# EAGLE board OpenBook_v69 (EAGLE 9.7.0)
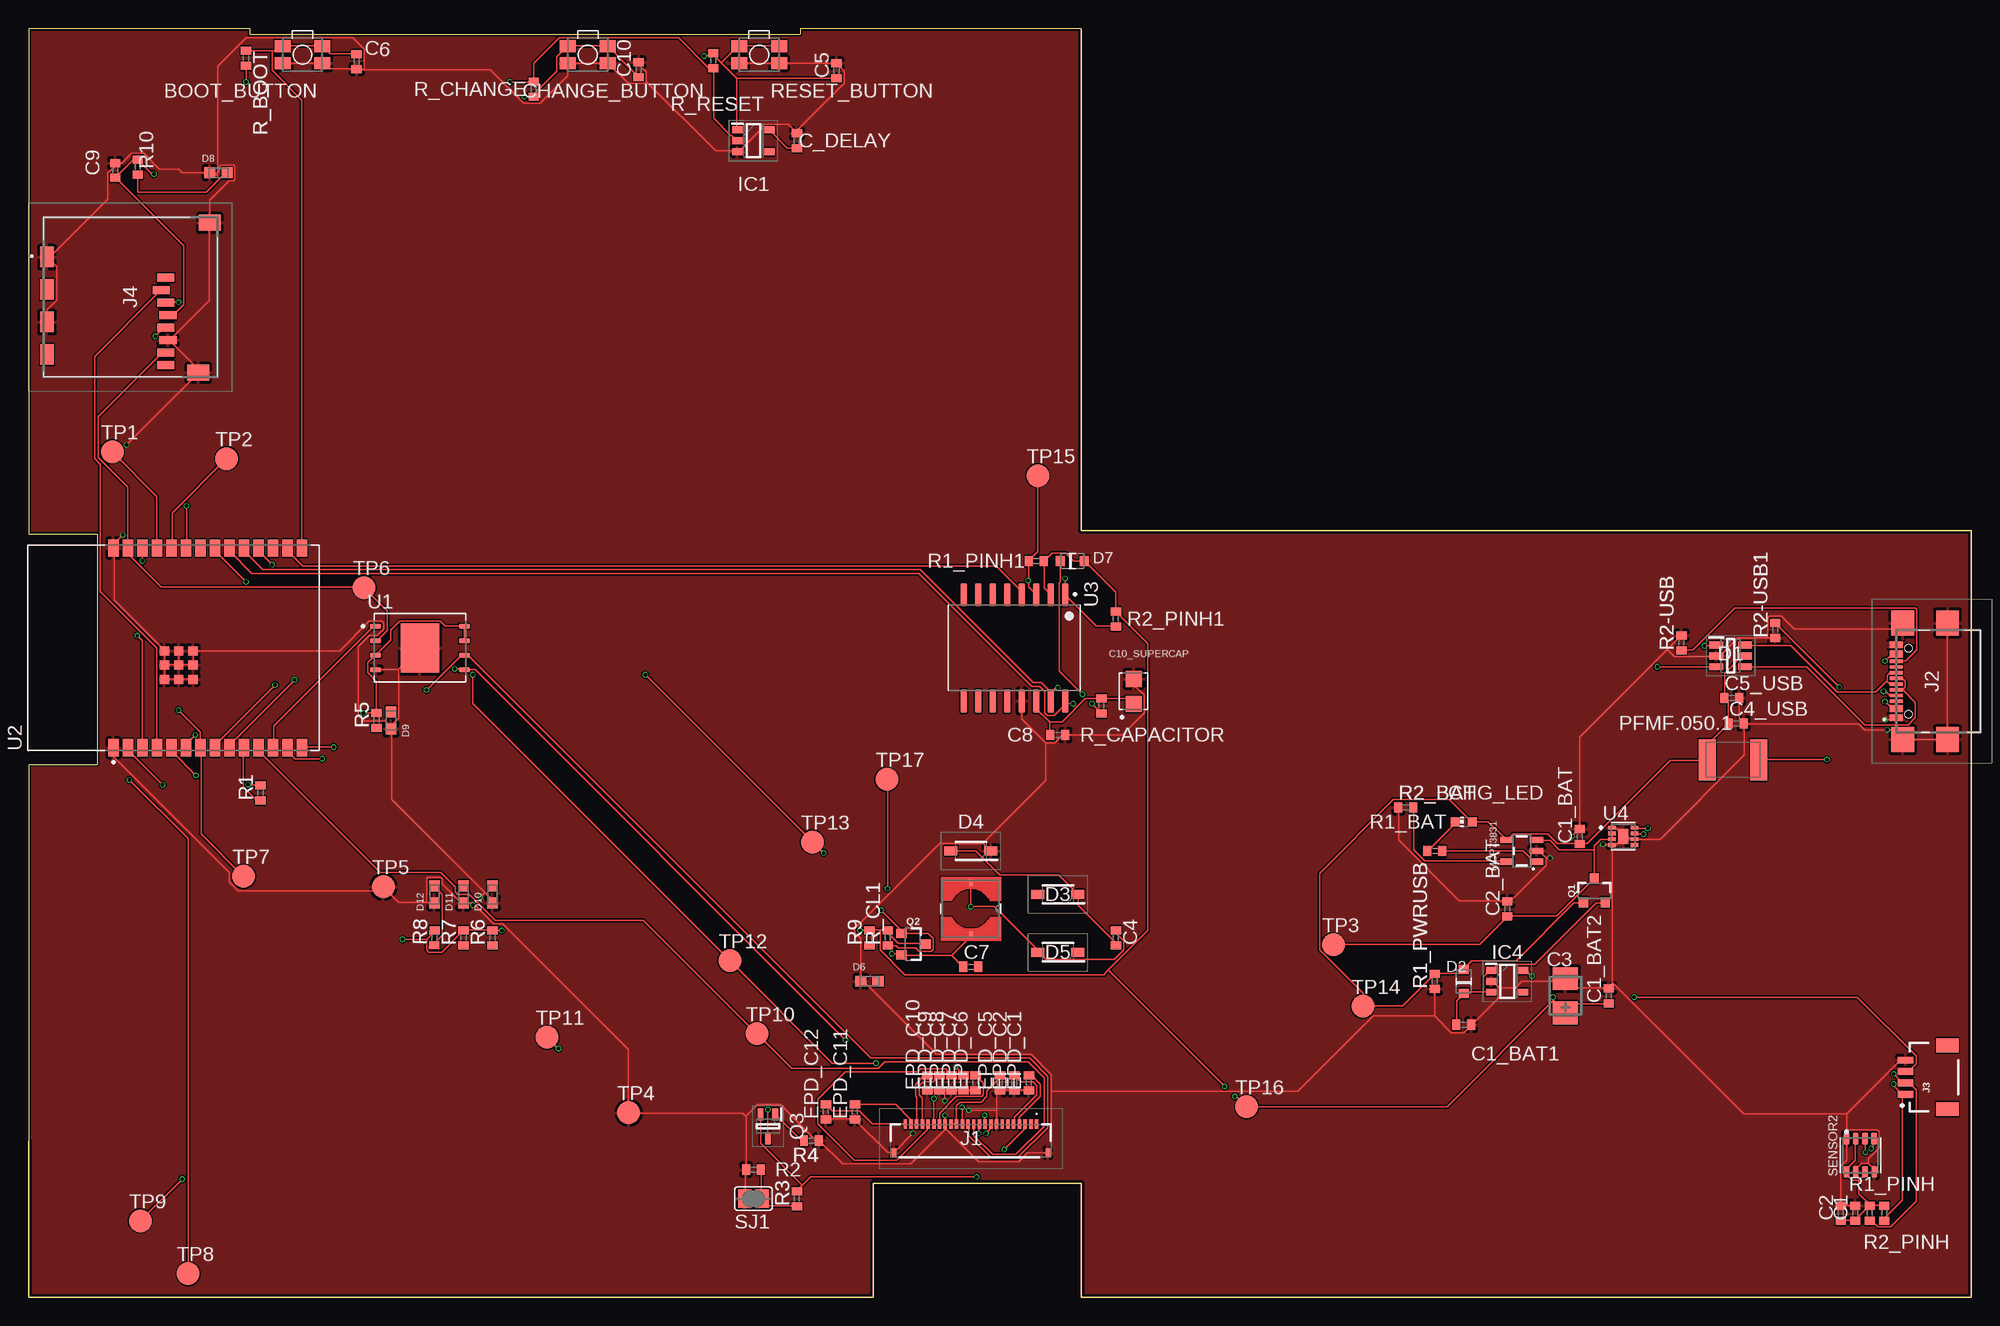
[diagram p0: board, top side]
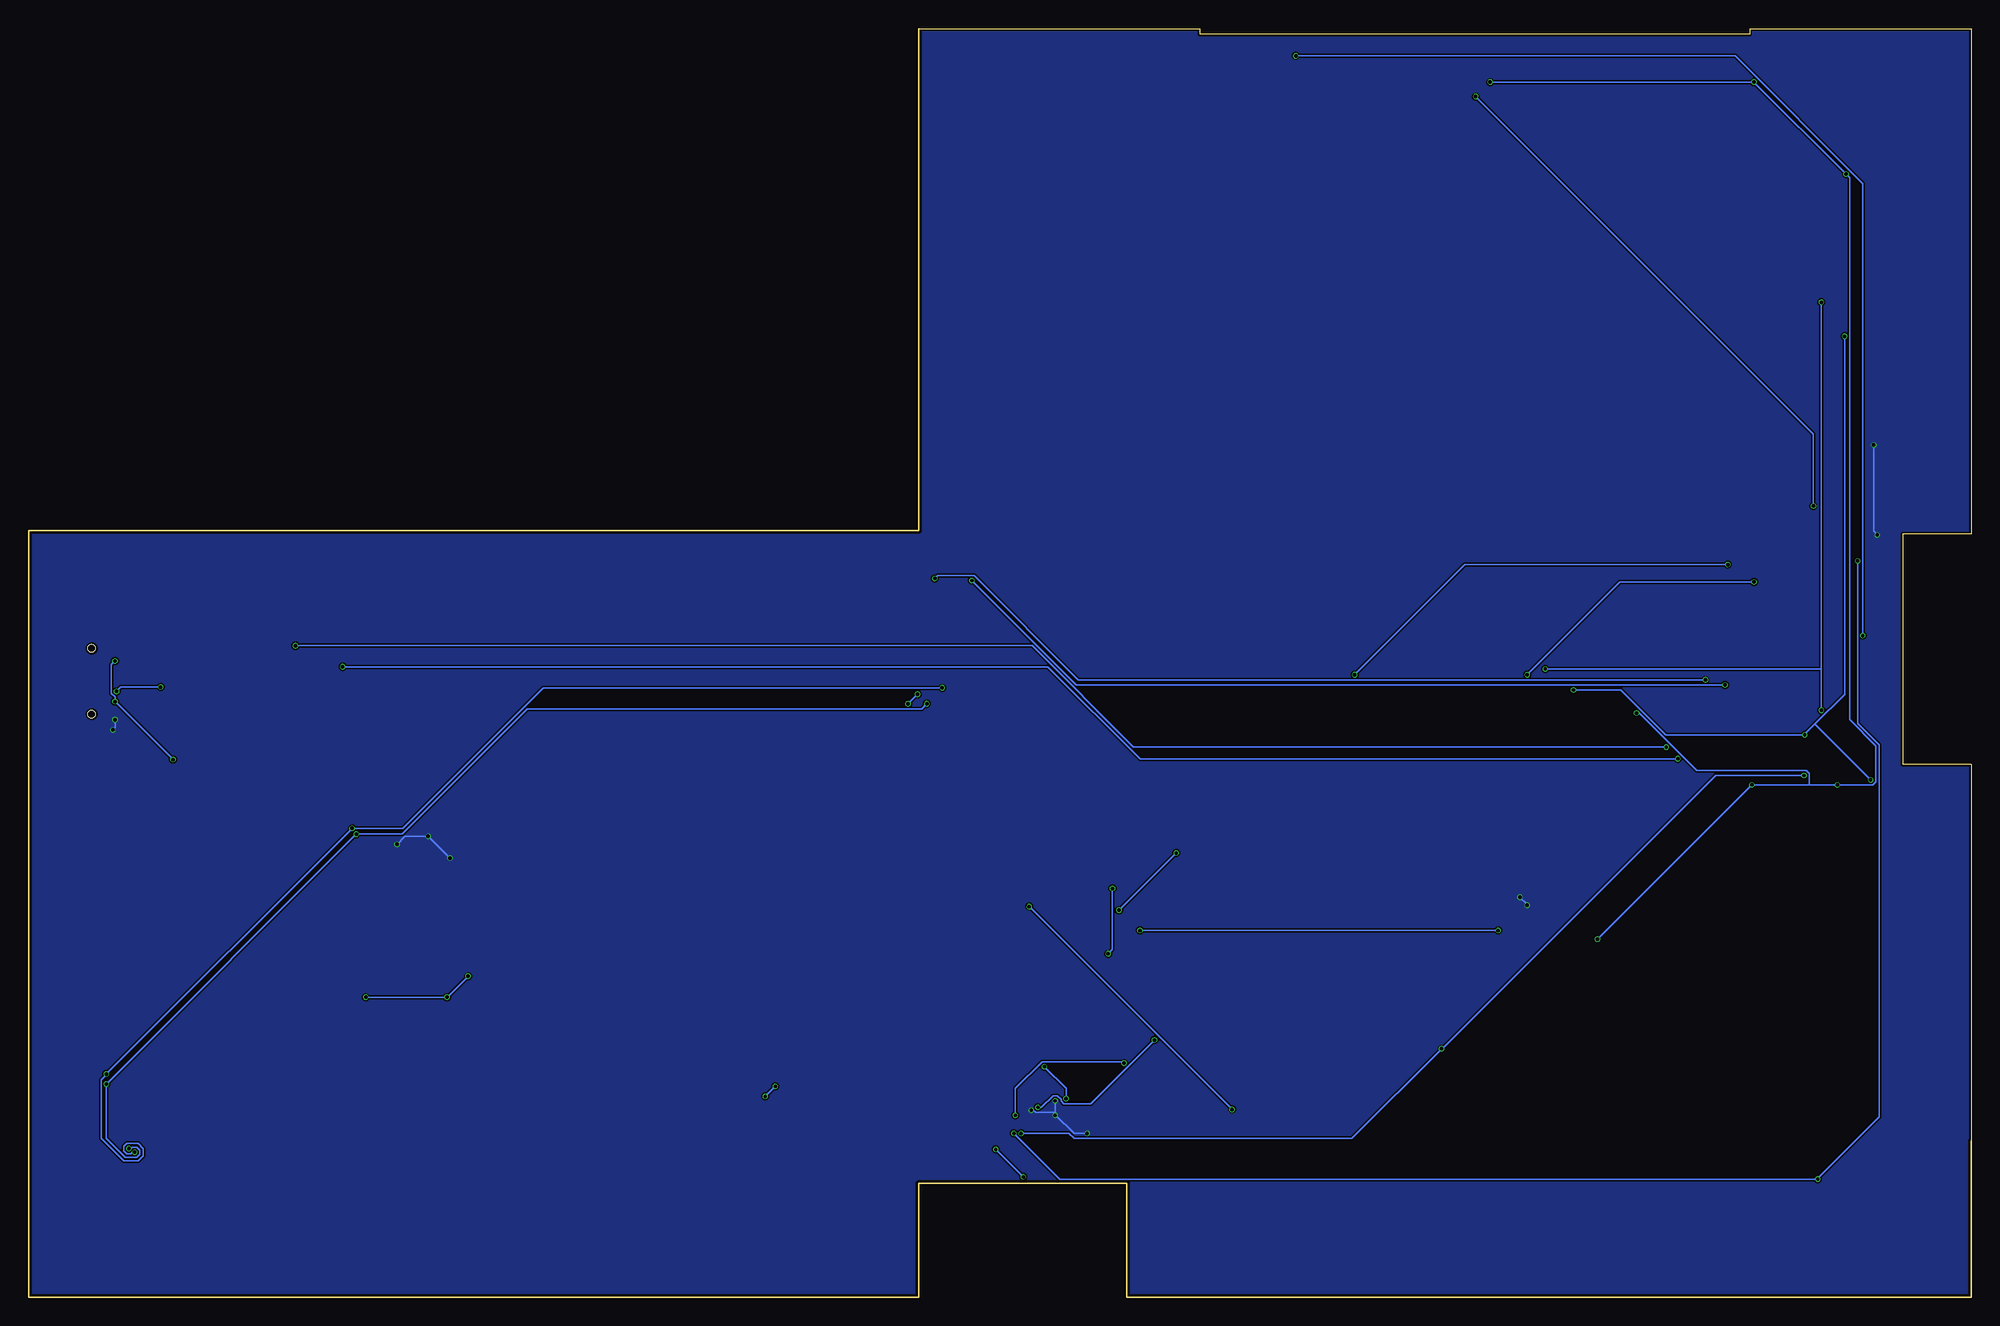
[diagram p1: board, bottom side, seen from below]

Size 170.2 x 111.2 mm. Coordinates in mm from the lower left corner, seen from the top.
Outline: 0,13.74 0,46.7 6,46.7 6,66.9 0,66.9 0,111.2 19.4,111.2 19.4,110.7 67.6,110.7 67.6,111.2 92.2,111.2 92.2,67.2 170.2,67.2 170.2,0 92.2,0 92.2,10 74,10 74,0 0,0 0,13.74
Outline: 0,13.74 0,11.2
Copper layers (1*16): Top 0.035mm / dielectric 1.6mm / Bottom 0.035mm
Design rules "jlcpcb-2layers": minimum track width 5mil, minimum drill 0.3mm, track to track 5mil, track to pad 5mil, pad to pad 5mil, via to via 5mil, smd to smd 5mil, copper to edge 0.2mm, drill to drill 6mil, minimum pad ring 10mil, minimum via ring 3mil, stop-mask expansion 4mil, vias tented up to drill 0mil, thermal gap 10mil
Net classes: 1 PWR: width 0.3 mm; 2 NORMAL: width 0.15 mm

## Footprints (pad centres in the part's own frame; a part is rotated, then mirrored left to right if it is on the bottom)
MYBUTTON = smd 1.4 x 1.05: 1 1.75,0.75; 2 -1.75,0.75; 3 -1.75,-0.75; 4 1.75,-0.75
EAGLE-LTSPICE_C0402 = smd 0.7 x 0.9: 1 -0.65,0; 2 0.65,0
RCL_CT3528 = smd 2 x 2.2: + -1.5,0; - 1.5,0
CAPCP3225X100N = smd 1.4 x 1.4: 1 -1.1,0; 2 1.1,0
ADAFRUIT_CHIP-LED0603 = smd 0.8 x 0.8: A 0,-0.75; C 0,0.75
SOT95P280X145-6N = smd 1.2 x 0.6: 1 -1.25,0.95; 2 -1.25,0; 3 -1.25,-0.95; 4 1.25,-0.95; 5 1.25,0; 6 1.25,0.95
ESP32_WROVER_AVX---SD0805S020S1R0_AVX_SD0805S020S1R0_0 = smd 0.8 x 0.9: 1 -1.05,0; 2 1.05,0
SOD3716X135N = smd 1.15 x 0.8: 1 -1.75,0; 2 1.75,0
DIOC1608X36N = smd 0.97 x 0.94: 1 -0.75,0; 2 0.75,0
SOT95P280X125-5N = smd 0.9 x 0.6: 1 -1.4,0.95; 2 -1.4,0; 3 -1.4,-0.95; 4 1.4,-0.95; 5 1.4,0.95
SOT95P280X120-5N = smd 0.9 x 0.6: 1 -1.4,0.95; 2 -1.4,0; 3 -1.4,-0.95; 4 1.4,-0.95; 5 1.4,0.95
FH34SRJ24S05SH99 = smd 0.3 x 0.8: 1 5.75,1.45; 2 5.25,1.45; 3 4.75,1.45; 4 4.25,1.45; 5 3.75,1.45; 6 3.25,1.45; 7 2.75,1.45; 8 2.25,1.45; 9 1.75,1.45; 10 1.25,1.45; 11 0.75,1.45; 12 0.25,1.45; 13 -0.25,1.45; 14 -0.75,1.45; 15 -1.25,1.45; 16 -1.75,1.45; 17 -2.25,1.45; 18 -2.75,1.45; 19 -3.25,1.45; 20 -3.75,1.45; 21 -4.25,1.45; 22 -4.75,1.45; 23 -5.25,1.45; 24 -5.75,1.45 | smd 0.4 x 0.8: MP1 6.75,-1.05; MP2 -6.75,-1.05
SAMACSYS_PARTS_USB4110GFA = smd 0.3 x 1.15: A1 -3.35,3.678; A4 -2.55,3.678; A5 -1.25,3.678; A6 -0.25,3.678; A7 0.25,3.678; A8 1.25,3.678; A9 2.55,3.678; A12 3.35,3.678; B1 3.05,3.678; B4 2.25,3.678; B5 1.75,3.678; B6 0.75,3.678; B7 -0.75,3.678; B8 -1.75,3.678; B9 -2.25,3.678; B12 -3.05,3.678 | smd 2.18 x 2: MP1 -5.11,-0.827; MP2 5.11,-0.827; MP3 -5.11,3.103; MP4 5.11,3.103 | hole 0.65: -2.89,2.603; 2.89,2.603
JST04_1MM_RA = smd 0.6 x 1.35: 1 -1.5,0; 2 -0.5,0; 3 0.5,0; 4 1.5,0 | smd 1.2 x 2: NC1 2.8,-3.675; NC2 -2.8,-3.675
112ATAARR03ATTEND = smd 1.8 x 1.2: G1 10.6,10.4; G2 4.9,10.4; S1 7.75,10.4; S2 2.05,10.4 | smd 1.4 x 1.9: G3 13.6,-3.85; G4 0.45,-2.85 | smd 0.7 x 1.5: P1 8.8,0; P2 7.7,0.4; P3 6.6,0; P4 5.5,-0.2; P5 4.4,0; P6 3.3,-0.2; P7 2.2,0; P8 1.1,0
IND_4828-WE-TPC_WRE = smd 0.61 x 0.305: 1 -2.286,0; 2 2.286,0
ESP32_WROVER_SPARKFUN-IC-POWER_SOT23-5 = smd 0.55 x 1.2: 1 -0.95,-1.3; 2 0,-1.3; 3 0.95,-1.3; 4 0.95,1.3; 5 -0.95,1.3
ESP32C6_VARISTOR_CT/CN1812 = smd 1.5 x 3.6: 1 -2.25,0; 2 2.25,0
ESP32_WROVER_SPARKFUN-DISCRETESEMI_SOT23-3 = smd 0.8 x 0.9: 1 -0.95,-1; 2 0.95,-1; 3 0,1.1
SOT65P210X110-3N = smd 1.05 x 0.5: 1 -1.05,0.65; 2 -1.05,-0.65; 3 1.05,0
ESP32_WROVER_EAGLE-LTSPICE_R0402 = smd 0.7 x 0.9: 1 -0.65,0; 2 0.65,0
ESP32_WROVER_BME680_PSON80P300X300X100-8N = smd 1.016 x 0.5: 1 1.458,1.2; 2 1.458,0.4; 3 1.458,-0.4; 4 1.458,-1.2; 5 -1.458,-1.22; 6 -1.458,-0.4; 7 -1.458,0.4; 8 -1.458,1.2
SJ = smd 1.168 x 1.6: 1 -0.762,0; 2 0.762,0
TP20R = smd 2 x 2: TP 0,0
SON127P600X800X80-9N = smd 0.94 x 0.44: 1 -3.895,1.905; 2 -3.895,0.635; 3 -3.895,-0.635; 4 -3.895,-1.905; 5 3.895,-1.905; 6 3.895,-0.635; 7 3.895,0.635; 8 3.895,1.905 | smd 3.4 x 4.3: 9 0,0
XCVR_ESP32-C6-WROOM-1-N8 = smd 1.5 x 0.9: 1 -8.75,5.26; 2 -8.75,3.99; 3 -8.75,2.72; 4 -8.75,1.45; 5 -8.75,0.18; 6 -8.75,-1.09; 7 -8.75,-2.36; 8 -8.75,-3.63; 9 -8.75,-4.9; 10 -8.75,-6.17; 11 -8.75,-7.44; 12 -8.75,-8.71; 13 -8.75,-9.98; 14 -8.75,-11.25; 15 8.75,-11.25; 16 8.75,-9.98; 17 8.75,-8.71; 18 8.75,-7.44; 19 8.75,-6.17; 20 8.75,-4.9; 21 8.75,-3.63; 22 8.75,-2.36; 23 8.75,-1.09; 24 8.75,0.18; 25 8.75,1.45; 26 8.75,2.72; 27 8.75,3.99; 28 8.75,5.26 | smd 0.8 x 0.8: 29_1 -2.755,0.79; 29_2 -1.505,0.79; 29_3 -0.255,0.79; 29_4 -2.755,-0.46; 29_5 -1.505,-0.46; 29_6 -0.255,-0.46; 29_7 -2.755,-1.71; 29_8 -1.505,-1.71; 29_9 -0.255,-1.71
SOIC127P1032X265-16N = smd 2.05 x 0.59: 1 -4.655,4.445; 2 -4.655,3.175; 3 -4.655,1.905; 4 -4.655,0.635; 5 -4.655,-0.635; 6 -4.655,-1.905; 7 -4.655,-3.175; 8 -4.655,-4.445; 9 4.655,-4.445; 10 4.655,-3.175; 11 4.655,-1.905; 12 4.655,-0.635; 13 4.655,0.635; 14 4.655,1.905; 15 4.655,3.175; 16 4.655,4.445
SON50P200X200X80-9N = smd 0.76 x 0.31: 1 -0.985,0.75; 2 -0.985,0.25; 3 -0.985,-0.25; 4 -0.985,-0.75; 5 0.985,-0.75; 6 0.985,-0.25; 7 0.985,0.25; 8 0.985,0.75 | smd 0.9 x 1.3: 9 0,0

## Placement (x,y rotation side)
BOOT_BUTTON  BUTTON_CUSYOMV1  [MYBUTTON]  24,108.91 180 top
C1  [EAGLE-LTSPICE_C0402]  160.02,7.39 90 top
C1_BAT  4.7uF  [EAGLE-LTSPICE_C0402]  135.89,40.41 90 top
C1_BAT1  4.7uF  [EAGLE-LTSPICE_C0402]  125.73,23.9 0 top
C1_BAT2  4.7uF  [EAGLE-LTSPICE_C0402]  138.43,26.44 90 top
C2  [EAGLE-LTSPICE_C0402]  158.75,7.39 90 top
C2_BAT  4.7uF  [EAGLE-LTSPICE_C0402]  129.54,34.06 90 top
C3  100uF  [RCL_CT3528]  134.62,26.44 90 top
C4  4.7uF/25V  [EAGLE-LTSPICE_C0402]  95.25,31.52 90 top
C4_USB  100nF  [EAGLE-LTSPICE_C0402]  149.6,50.3 0 top
C5  [EAGLE-LTSPICE_C0402]  70.78,107.49 90 top
C5_USB  4.7uF  [EAGLE-LTSPICE_C0402]  149.2,52.54 0 top
C6  100nF  [EAGLE-LTSPICE_C0402]  28.74,108.29 270 top
C7  [EAGLE-LTSPICE_C0402]  82.55,28.98 0 top
C8  100nF  [EAGLE-LTSPICE_C0402]  90.17,49.3 0 top
C9  100nF  [EAGLE-LTSPICE_C0402]  7.59,98.76 90 top
C10  10nF  [EAGLE-LTSPICE_C0402]  53.44,107.59 90 top
C10_SUPERCAP  CPH3225A  [CAPCP3225X100N]  96.8,53.11 90 top
C_DELAY  100nF  [EAGLE-LTSPICE_C0402]  67.31,101.37 90 top
CHANGE_BUTTON  BUTTON_CUSYOMV1  [MYBUTTON]  49,108.91 180 top
CHG_LED  [ADAFRUIT_CHIP-LED0603]  125.73,41.68 90 top
D1  USBLC6-2SC6Y  [SOT95P280X145-6N]  149.1,56.22 0 top
D2  ESP32_WROVER_AVX---SD0805S020S1R0_AVX_SD0805S020S1R0_0_0AVX_SD0805S020S1R0_0_0  [ESP32_WROVER_AVX---SD0805S020S1R0_AVX_SD0805S020S1R0_0]  125.73,27.71 90 top
D3  MBR0530  [SOD3716X135N]  90.17,35.33 180 top
D4  MBR0530  [SOD3716X135N]  82.55,39.14 180 top
D5  MBR0530  [SOD3716X135N]  90.17,30.25 180 top
D6  PGB1010603MR  [DIOC1608X36N]  73.66,27.71 0 top
D7  ESP32_WROVER_AVX---SD0805S020S1R0_AVX_SD0805S020S1R0_0_0AVX_SD0805S020S1R0_0_0  [ESP32_WROVER_AVX---SD0805S020S1R0_AVX_SD0805S020S1R0_0]  91.44,64.54 0 top
D8  PGB1010603MR  [DIOC1608X36N]  16.64,98.56 0 top
D9  PGB1010603MR  [DIOC1608X36N]  31.75,50.57 90 top
D10  PGB1010603MR  [DIOC1608X36N]  40.64,35.33 90 top
D11  PGB1010603MR  [DIOC1608X36N]  38.1,35.33 90 top
D12  PGB1010603MR  [DIOC1608X36N]  35.56,35.33 90 top
EPD_C1  1uF/50V  [EAGLE-LTSPICE_C0402]  87.63,18.82 90 top
EPD_C2  1uF/50V  [EAGLE-LTSPICE_C0402]  86.36,18.82 90 top
EPD_C5  0.1uF/50V  [EAGLE-LTSPICE_C0402]  85.09,18.82 90 top
EPD_C6  1uF/50V  [EAGLE-LTSPICE_C0402]  82.95,18.82 90 top
EPD_C7  1uF/50V  [EAGLE-LTSPICE_C0402]  81.9,18.82 90 top
EPD_C8  1uF/50V  [EAGLE-LTSPICE_C0402]  80.84,18.82 90 top
EPD_C9  [EAGLE-LTSPICE_C0402]  79.79,18.82 90 top
EPD_C10  10uF/50  [EAGLE-LTSPICE_C0402]  78.74,18.82 90 top
EPD_C11  1uF/50V  [EAGLE-LTSPICE_C0402]  72.39,16.28 90 top
EPD_C12  1uF/50V  [EAGLE-LTSPICE_C0402]  69.85,16.28 90 top
IC1  BD5229G-TR  [SOT95P280X125-5N]  63.5,101.37 0 top
IC4  XC6220A331MR-G  [SOT95P280X120-5N]  129.54,27.71 0 top
J1  FH34SRJ-24S-0.5SH_99_  [FH34SRJ24S05SH99]  82.55,13.74 0 top
J2  SAMACSYS_PARTS_USB4110-GF-A  [SAMACSYS_PARTS_USB4110GFA]  167.28,54 90 top
J3  QWIIC_RIGHT_ANGLE  [JST04_1MM_RA]  164.43,19.3 90 top
J4  112A-TAAR-R03_ATTEND  [112ATAARR03ATTEND]  12.02,80.58 90 top
L1  744043680IND_4828-WE-TPC_WRE  [IND_4828-WE-TPC_WRE]  82.55,34.06 270 top
MCP73831  ESP32_WROVER_SPARKFUN-IC-POWER_MCP73831  [ESP32_WROVER_SPARKFUN-IC-POWER_SOT23-5]  130.81,39.14 90 top
PFMF.050.1  ESP32C6_VARISTORCN1812  [ESP32C6_VARISTOR_CT/CN1812]  149.3,47.11 180 top
Q1  20V/4.2A/52mΩ/1.4W  [ESP32_WROVER_SPARKFUN-DISCRETESEMI_SOT23-3]  137.16,35.62 0 top
Q2  20V/4.2A/52mΩ/1.4W  [ESP32_WROVER_SPARKFUN-DISCRETESEMI_SOT23-3]  77.47,30.96 270 top
Q3  SI1308EDL-T1-GE3  [SOT65P210X110-3N]  64.77,15.01 270 top
R1  10K  [ESP32_WROVER_EAGLE-LTSPICE_R0402]  20.32,44.22 90 top
R1_BAT  200  [ESP32_WROVER_EAGLE-LTSPICE_R0402]  123.19,39.14 0 top
R1_PINH  10K  [ESP32_WROVER_EAGLE-LTSPICE_R0402]  161.29,7.39 90 top
R1_PINH1  10K  [ESP32_WROVER_EAGLE-LTSPICE_R0402]  88.28,64.54 0 top
R1_PWRUSB  100K  [ESP32_WROVER_EAGLE-LTSPICE_R0402]  123.19,27.71 90 top
R2  [ESP32_WROVER_EAGLE-LTSPICE_R0402]  63.5,11.2 0 top
R2-USB  5k1  [ESP32_WROVER_EAGLE-LTSPICE_R0402]  144.79,57.36 90 top
R2-USB1  5k1  [ESP32_WROVER_EAGLE-LTSPICE_R0402]  153.01,58.46 90 top
R2_BAT  2K  [ESP32_WROVER_EAGLE-LTSPICE_R0402]  120.65,42.95 0 top
R2_PINH  10K  [ESP32_WROVER_EAGLE-LTSPICE_R0402]  162.56,7.39 90 top
R2_PINH1  10K  [ESP32_WROVER_EAGLE-LTSPICE_R0402]  95.25,59.46 90 top
R3  0.47  [ESP32_WROVER_EAGLE-LTSPICE_R0402]  67.31,8.66 90 top
R4  10K  [ESP32_WROVER_EAGLE-LTSPICE_R0402]  68.58,13.74 180 top
R5  10K  [ESP32_WROVER_EAGLE-LTSPICE_R0402]  30.48,50.57 90 top
R6  10K  [ESP32_WROVER_EAGLE-LTSPICE_R0402]  40.64,31.52 90 top
R7  10K  [ESP32_WROVER_EAGLE-LTSPICE_R0402]  38.1,31.52 90 top
R8  10K  [ESP32_WROVER_EAGLE-LTSPICE_R0402]  35.56,31.52 88.1 top
R9  10K  [ESP32_WROVER_EAGLE-LTSPICE_R0402]  73.66,31.52 90 top
R10  10K  [ESP32_WROVER_EAGLE-LTSPICE_R0402]  9.56,99.06 90 top
R_BOOT  10K  [ESP32_WROVER_EAGLE-LTSPICE_R0402]  19.05,108.59 270 top
R_CAPACITOR  15  [ESP32_WROVER_EAGLE-LTSPICE_R0402]  93.98,51.84 90 top
R_CHANGE  10K  [ESP32_WROVER_EAGLE-LTSPICE_R0402]  44.25,105.88 90 top
R_CL1  10K  [ESP32_WROVER_EAGLE-LTSPICE_R0402]  75.26,31.52 90 top
R_RESET  10K  [ESP32_WROVER_EAGLE-LTSPICE_R0402]  59.99,108.39 90 top
RESET_BUTTON  BUTTON_CUSYOMV1  [MYBUTTON]  64,108.91 180 top
SENSOR2  ESP32_WROVER_BME680_BME680  [ESP32_WROVER_BME680_PSON80P300X300X100-8N]  160.46,12.47 90 top
SJ1  [SJ]  63.5,8.66 0 top
TP1  TPTP20R  [TP20R]  7.34,74.11 0 top
TP2  TPTP20R  [TP20R]  17.36,73.51 0 top
TP3  TPTP20R  [TP20R]  114.31,30.91 0 top
TP4  TPTP20R  [TP20R]  52.56,16.19 0 top
TP5  TPTP20R  [TP20R]  31.08,35.99 0 top
TP6  TPTP20R  [TP20R]  29.4,62.21 0 top
TP7  TPTP20R  [TP20R]  18.85,36.91 0 top
TP8  TPTP20R  [TP20R]  13.97,2.09 0 top
TP9  TPTP20R  [TP20R]  9.79,6.71 0 top
TP10  TPTP20R  [TP20R]  63.82,23.11 0 top
TP11  TPTP20R  [TP20R]  45.42,22.81 0 top
TP12  TPTP20R  [TP20R]  61.44,29.51 0 top
TP13  TPTP20R  [TP20R]  68.66,39.91 0 top
TP14  TPTP20R  [TP20R]  116.88,25.51 0 top
TP15  TPTP20R  [TP20R]  88.42,72.01 0 top
TP16  TPTP20R  [TP20R]  106.7,16.71 0 top
TP17  TPTP20R  [TP20R]  75.2,45.41 0 top
U1  W25Q512JVEIQ  [SON127P600X800X80-9N]  34.29,56.92 0 top
U2  ESP32-C6-WROOM-1-N8  [XCVR_ESP32-C6-WROOM-1-N8]  12.7,56.92 90 top
U3  DS3231SN#  [SOIC127P1032X265-16N]  86.36,56.92 270 top
U4  MAX17048G+T10  [SON50P200X200X80-9N]  139.7,40.41 0 top

## Library data of the parts
BOOT_BUTTON CHANGE_BUTTON CHG_LED PFMF.050.1 RESET_BUTTON SJ1 TP1-TP17 = DeskAssistant v19 v1
C1 C1_BAT C1_BAT1 C1_BAT2 C2 C2_BAT C4 C4_USB C5 C5_USB C6-C10 C_DELAY EPD_C1 EPD_C2 EPD_C5-EPD_C12 = DeskAssistant v19 v1; SPICEMODEL: NONE; SPICEPREFIX: C
C3 = DeskAssistant v19 v1; SPICEPREFIX: C
C10_SUPERCAP = DeskAssistant v19 v1; AVAILABILITY: Not in stock; CHECK_PRICES: https://www.snapeda.com/parts/CPH3225A/Seiko+Instruments/view-part/?ref=eda; DESCRIPTION: 11 mF (EDLC) Supercapacitor 3.3 V 1210 (3225 Metric) - -; MF: Seiko Instruments; MP: CPH3225A; PACKAGE: 1210 Seiko; PRICE: None; PURCHASE-URL: https://www.snapeda.com/api/url_track_click_mouser/?unipart_id=562593&manufacturer=Seiko Instruments&part_name=CPH3225A&search_term=None; SNAPEDA_LINK: https://www.snapeda.com/parts/CPH3225A/Seiko+Instruments/view-part/?ref=snap
D1 = DeskAssistant v19 v1; AVAILABILITY: In Stock; CHECK_PRICES: https://www.snapeda.com/parts/USBLC6-2SC6Y/STMicroelectronics/view-part/?ref=eda; DESCRIPTION: 17V Clamp 5A (8/20µs) Ipp Tvs Diode Surface Mount SOT-23-6; MF: STMicroelectronics; MP: USBLC6-2SC6Y; PACKAGE: SOT-23-6 STMicroelectronics; PRICE: None; SNAPEDA_LINK: https://www.snapeda.com/parts/USBLC6-2SC6Y/STMicroelectronics/view-part/?ref=snap
D2 D7 = DeskAssistant v19 v1; CENTROID_NOT_SPECIFIED: No; DATASHEET: http://datasheets.avx.com/schottky.pdf; DIGIKEY_DESCRIPTION: DIODE SCHOTTKY 20V 1A 0805; DIGIKEY_PART_NUMBER: 478-7800-1-ND; LEAD_FREE: yes; MF: AVX; MOUSER_PART_NUMBER: 581-SD0805S020S1R0; PACKAGE: 0805 (2012 metric); PREFIX: D; ROHS: yes; TEMPERATURE_RANGE_HIGH: +125°C; TEMPERATURE_RANGE_LOW: -55°C
D3-D5 = DeskAssistant v19 v1; AVAILABILITY: In Stock; CHECK_PRICES: https://www.snapeda.com/parts/MBR0530/Onsemi/view-part/?ref=eda; DESCRIPTION: Diode Schottky 30 V 500mA Surface Mount SOD-123; MF: ON Semiconductor; MP: MBR0530; PACKAGE: SOD-123-2 ON Semiconductor; PRICE: None; PURCHASE-URL: https://www.snapeda.com/api/url_track_click_mouser/?unipart_id=179458&manufacturer=ON Semiconductor&part_name=MBR0530&search_term=None; SNAPEDA_LINK: https://www.snapeda.com/parts/MBR0530/Onsemi/view-part/?ref=snap
D6 D8-D12 = DeskAssistant v19 v1; AVAILABILITY: In Stock; CHECK_PRICES: https://www.snapeda.com/parts/PGB1010603MR/Littelfuse/view-part/?ref=eda; DESCRIPTION: 150V (Typ) Clamp - Ipp Tvs Diode Surface Mount 0603 (1608 Metric); MF: Littelfuse Inc.; MP: PGB1010603MR; PACKAGE: 0603 Littelfuse Inc.; PRICE: None; PURCHASE-URL: https://www.snapeda.com/api/url_track_click_mouser/?unipart_id=5659453&manufacturer=Littelfuse Inc.&part_name=PGB1010603MR&search_term=None; SNAPEDA_LINK: https://www.snapeda.com/parts/PGB1010603MR/Littelfuse/view-part/?ref=snap
IC1 = DeskAssistant v19 v1; DESCRIPTION: Voltage Detector with Adjustable Delay Time: CMOS processes are utilized to develop high precision, low current consumption CMOS reset ICs that allow arbitrary setting of the delay time. The extensive lineup includes both Nch Open Drain and CMOS output types in a wide range of detection voltages (from 2.3V to 6.0V, in 0.1V steps), enabling selection of the ideal solution based on customer requirements. In addition, the entire series is of course both lead-free and RoHS-compliant.; HEIGHT: 1.25mm; MANUFACTURER_NAME: ROHM Semiconductor; MANUFACTURER_PART_NUMBER: BD5229G-TR; MOUSER_PART_NUMBER: 755-BD5229G-TR; MOUSER_PRICE-STOCK: https://www.mouser.co.uk/ProductDetail/ROHM-Semiconductor/BD5229G-TR?qs=4kLU8WoGk0vvnhrrYwdszw%3D%3D
IC4 = DeskAssistant v19 v1; DESCRIPTION: LDO Voltage Regulators; HEIGHT: 1.2mm; MANUFACTURER_NAME: Torex; MANUFACTURER_PART_NUMBER: XC6220A331MR-G; MOUSER_PART_NUMBER: 865-XC6220A331MR-G; MOUSER_PRICE-STOCK: https://www.mouser.co.uk/ProductDetail/Torex-Semiconductor/XC6220A331MR-G?qs=AsjdqWjXhJ8ZSWznL1J0gg%3D%3D
J1 = DeskAssistant v19 v1; DESCRIPTION: 24 Position FFC, FPC Connector Contacts, Top and Bottom 0.020" (0.50mm) Surface Mount, Right Angle; HEIGHT: 1.1mm; MANUFACTURER_NAME: Hirose; MANUFACTURER_PART_NUMBER: FH34SRJ-24S-0.5SH(99); MOUSER_PART_NUMBER: 798-FH34SRJ24S05SH99; MOUSER_PRICE-STOCK: https://www.mouser.co.uk/ProductDetail/Hirose-Connector/FH34SRJ-24S-0.5SH99?qs=vcbW%252B4%252BSTIpKBl5ap9J8Fw%3D%3D
J2 = DeskAssistant v19 v1; DESCRIPTION: CONN USB 2.0 TYPE-C R/A SMT; HEIGHT: 3.26mm; MANUFACTURER_NAME: GCT (GLOBAL CONNECTOR TECHNOLOGY); MANUFACTURER_PART_NUMBER: USB4110-GF-A; MOUSER_PART_NUMBER: 640-USB4110-GF-A; MOUSER_PRICE-STOCK: https://www.mouser.co.uk/ProductDetail/GCT/USB4110-GF-A?qs=KUoIvG%2F9IlYiZvIXQjyJeA%3D%3D
J3 = DeskAssistant v19 v1; PROD_ID: CONN-13694
J4 = DeskAssistant v19 v1; DESCRIPTION: Micro SD Card Socket, Push-Push Type, Top Mount, SMT, H=1.83mm, 10u; HEIGHT: 1.9mm; MANUFACTURER_NAME: ATTEND; MANUFACTURER_PART_NUMBER: 112A-TAAR-R03 ATTEND
L1 = DeskAssistant v19 v1; COPYRIGHT: Copyright (C) 2024 Ultra Librarian. All rights reserved.; MANUFACTURER_PART_NUMBER: 744043680; MFR_NAME: Wurth Electronics
MCP73831 = DeskAssistant v19 v1; PROD_ID: IC-09995
Q1 Q2 = DeskAssistant v19 v1; PROD_ID: TRAN-14388
Q3 = DeskAssistant v19 v1; AVAILABILITY: In Stock; CHECK_PRICES: https://www.snapeda.com/parts/SI1308EDL-T1-GE3/Vishay+Siliconix/view-part/?ref=eda; DESCRIPTION: Si1308EDL-T1-GE3 N-channel MOSFET Transistor, 1.5 A, 30 V, 3-Pin SC-70 | Siliconix / Vishay SI1308EDL-T1-GE3; MF: Vishay Siliconix; MP: SI1308EDL-T1-GE3; PACKAGE: SOT-323 Vishay Semiconductor; PRICE: None; PURCHASE-URL: https://www.snapeda.com/api/url_track_click_mouser/?unipart_id=274603&manufacturer=Vishay Siliconix&part_name=SI1308EDL-T1-GE3&search_term=None; SNAPEDA_LINK: https://www.snapeda.com/parts/SI1308EDL-T1-GE3/Vishay+Siliconix/view-part/?ref=snap
R1 R1_BAT R1_PINH R1_PINH1 R1_PWRUSB R2 R2-USB R2-USB1 R2_BAT R2_PINH R2_PINH1 R3-R10 R_BOOT R_CAPACITOR R_CHANGE R_CL1 R_RESET = DeskAssistant v19 v1; SPICEMODEL: NONE; SPICEPREFIX: R
SENSOR2 = DeskAssistant v19 v1; AVAILABILITY: Unavailable; DESCRIPTION: Integrated Environmental Unit; MF: Bosch Sensortec; MP: BME680; PACKAGE: LGA-8 Bosch Tools; PRICE: None
U1 = DeskAssistant v19 v1; AVAILABILITY: In Stock; CHECK_PRICES: https://www.snapeda.com/parts/W25Q512JVEIQ/Winbond+Electronics/view-part/?ref=eda; DESCRIPTION: FLASH - NOR Memory IC 512Mb (64M x 8) SPI - Quad I/O 133 MHz 8-WSON (8x6); MF: Winbond Electronics; MP: W25Q512JVEIQ; PACKAGE: Package; PRICE: None; SNAPEDA_LINK: https://www.snapeda.com/parts/W25Q512JVEIQ/Winbond+Electronics/view-part/?ref=snap
U2 = DeskAssistant v19 v1; AVAILABILITY: In Stock; CHECK_PRICES: https://www.snapeda.com/parts/ESP32-C6-WROOM-1-N8/Espressif+Systems/view-part/?ref=eda; DESCRIPTION: Multiprotocol Modules ESP32-C6 module, Wi-Fi 6 in 2.4 GHz band, Bluetooth 5, Zigbee 3.0 and Thread. ESP34-WROOM Compatible - ENGINEERING SAMPLE; MF: Espressif Systems; MP: ESP32-C6-WROOM-1-N8; PACKAGE: None; PRICE: None; SNAPEDA_LINK: https://www.snapeda.com/parts/ESP32-C6-WROOM-1-N8/Espressif+Systems/view-part/?ref=snap
U3 = DeskAssistant v19 v1; AVAILABILITY: In Stock; CHECK_PRICES: https://www.snapeda.com/parts/DS3231SN%23/Analog+Devices/view-part/?ref=eda; DESCRIPTION: Extremely Accurate I²C-Integrated RTC/TCXO/Crystal; MF: Analog Devices; MP: DS3231SN#; PACKAGE: SOIC-16 Maxim; PRICE: None; PURCHASE-URL: https://www.snapeda.com/api/url_track_click_mouser/?unipart_id=99048&manufacturer=Analog Devices&part_name=DS3231SN#&search_term=None; SNAPEDA_LINK: https://www.snapeda.com/parts/DS3231SN%23/Analog+Devices/view-part/?ref=snap
U4 = DeskAssistant v19 v1; AVAILABILITY: In Stock; CHECK_PRICES: https://www.snapeda.com/parts/MAX17048G+T10/Analog+Devices/view-part/?ref=eda; DESCRIPTION: 3µA 1-Cell/2-Cell Fuel Gauge with ModelGauge; MF: Analog Devices; MP: MAX17048G+T10; PACKAGE: TDFN-8 Maxim; PRICE: None; PURCHASE-URL: https://www.snapeda.com/api/url_track_click_mouser/?unipart_id=329239&manufacturer=Analog Devices&part_name=MAX17048G+T10&search_term=None; SNAPEDA_LINK: https://www.snapeda.com/parts/MAX17048G+T10/Analog+Devices/view-part/?ref=snap

## Nets
3V3: C1_BAT2.1 C3.+ C9.1 D7.2 IC1.2 IC4.5 J3.3 J4.P4 Q2.3 R1.2 R1_PINH1.2 R2_PINH1.2 R5.2 R6.2 R7.2 R8.2 R9.2 R10.2 R_BOOT.2 R_CHANGE.2 R_CL1.2 R_RESET.1 TP16.TP U1.3 U1.7 U1.8 U2.2 U3.2
12C_PW [NORMAL]: U2.17
32KHZ [NORMAL]: R2_PINH1.1 U2.9 U3.1
DN [NORMAL]: D1.4 J2.A7 J2.B7
DP [NORMAL]: D1.6 J2.A6 J2.B6
EPD_3V3: C7.1 L1.2 Q2.2 TP17.TP
EPD_3V3_C: Q2.1 R_CL1.1 TP13.TP U2.18
EPD_BUSY [NORMAL]: J1.9 TP9.TP U2.26
EPD_CS [NORMAL]: J1.12 TP10.TP U2.11
EPD_DC [NORMAL]: J1.11 TP11.TP U2.5
EPD_RST [NORMAL]: J1.10 TP12.TP U2.21
FLASH_CS [NORMAL]: U1.1 U2.12
GDR [NORMAL]: J1.2
GND [NORMAL]: BOOT_BUTTON.1 BOOT_BUTTON.2 C1.2 C1_BAT1.2 C1_BAT2.2 C1_BAT.2 C2.2 C2_BAT.2 C3.- C4_USB.2 C5.2 C5_USB.2 C6.2 C8.2 C9.2 C10.2 C10_SUPERCAP.2 C_DELAY.2 CHANGE_BUTTON.1 CHANGE_BUTTON.2 D1.2 D4.1 D6.1 D8.1 D9.1 D10.1 D11.1 D12.1 EPD_C1.1 EPD_C2.1 EPD_C5.1 EPD_C6.1 EPD_C7.1 EPD_C8.1 EPD_C9.1 EPD_C10.1 EPD_C11.1 EPD_C12.1 IC1.3 IC4.2 J1.8 J1.17 J1.MP1 J1.MP2 J2.A1 J2.A12 J2.B1 J2.B12 J2.MP1 J2.MP2 J2.MP3 J2.MP4 J3.4 J4.G1 J4.G2 J4.G3 J4.G4 J4.P6 MCP73831.2 R1_PWRUSB.1 R2-USB1.1 R2-USB.2 R2.1 R2_BAT.1 R4.1 RESET_BUTTON.1 RESET_BUTTON.2 SENSOR2.1 SENSOR2.5 SENSOR2.7 SJ1.1 TP4.TP TP5.TP U1.4 U1.9 U2.1 U2.28 U2.29_1 U2.29_2 U2.29_3 U2.29_4 U2.29_5 U2.29_6 U2.29_7 U2.29_8 U2.29_9 U3.13 U4.1 U4.4 U4.6 U4.9
GPIO8 [NORMAL]: R1.1 U2.10
I2C_PW [NORMAL]: C1.1 C2.1 R1_PINH.2 R2_PINH.2 SENSOR2.2 SENSOR2.6 SENSOR2.8
INT_RTC [NORMAL]: R1_PINH1.1 TP15.TP U2.8 U3.3
IO/BOOT [NORMAL]: BOOT_BUTTON.3 BOOT_BUTTON.4 C6.1 R_BOOT.1 U2.15
IO/CHANGE [NORMAL]: C10.1 CHANGE_BUTTON.3 CHANGE_BUTTON.4 R_CHANGE.1 U2.23
MISO [NORMAL]: J4.P7 TP6.TP U1.2 U2.27
MOSI [NORMAL]: J1.14 J4.P3 TP7.TP U1.5 U2.7
N$1 [NORMAL]: J2.B5 R2-USB.1
N$2 [NORMAL]: J2.A5 R2-USB1.2
N$4 [NORMAL]: C1_BAT1.1 D2.1 IC4.1 IC4.3 Q1.2
N$5 [NORMAL]: C4.1 D3.1 D4.2
N$6 [NORMAL]: MCP73831.5 R2_BAT.2
N$7 [NORMAL]: Q3.1 R4.2
N$8 [NORMAL]: EPD_C1.2 J1.4
N$9 [NORMAL]: MCP73831.1 R1_BAT.2
N$10 [NORMAL]: CHG_LED.C R1_BAT.1
N$11 [NORMAL]: EPD_C2.2 J1.5
N$12 [NORMAL]: EPD_C6.2 J1.18
N$13 [NORMAL]: EPD_C7.2 J1.19
N$14 [NORMAL]: EPD_C8.2 J1.20
N$15 [NORMAL]: EPD_C9.2 J1.21
N$16 [NORMAL]: EPD_C10.2 J1.22
N$17 [NORMAL]: EPD_C12.2 J1.24
N$18 [NORMAL]: EPD_C11.2 J1.23
N$19 [NORMAL]: EPD_C5.2 J1.15 J1.16
N$20 [NORMAL]: C_DELAY.1 IC1.5
N$21 [NORMAL]: D7.1 R_CAPACITOR.1
N$22 [NORMAL]: D12.2 R8.1
N$23 [NORMAL]: D11.2
N$24 [NORMAL]: D10.2
N$25 [NORMAL]: D9.2
N$26 [NORMAL]: D6.2
N$27 [NORMAL]: D8.2 R10.1
PREVGH: D5.1
PREVGL: D3.2
RESE [NORMAL]: J1.3 Q3.2 R3.2
RESE' [NORMAL]: R2.2 R3.1 SJ1.2
RESET [NORMAL]: C5.1 IC1.1 R_RESET.2 RESET_BUTTON.3 RESET_BUTTON.4 U2.3
RTC_RST [NORMAL]: U2.16 U3.4
RX [NORMAL]: TP2.TP U2.24
SCK [NORMAL]: J1.13 J4.P5 TP8.TP U1.6 U2.6
SCL [NORMAL]: J3.1 R2_PINH.1 SENSOR2.4 U2.20 U3.16 U4.7
SDA [NORMAL]: J3.2 R1_PINH.1 SENSOR2.3 U2.19 U3.15 U4.8
SRC [NORMAL]: C4.2 D5.2 L1.1 Q3.3
SS_SD [NORMAL]: J4.P2 U2.4
TX [NORMAL]: TP1.TP U2.25
USB_D+ [NORMAL]: D1.1 U2.14
USB_D- [NORMAL]: D1.3 U2.13
VBAT: C2_BAT.1 MCP73831.3 Q1.3 TP3.TP U4.2 U4.3
VBUS: C1_BAT.1 C4_USB.1 C5_USB.1 CHG_LED.A D1.5 D2.2 MCP73831.4 PFMF.050.1.2 Q1.1 R1_PWRUSB.2 TP14.TP
VRTC: C8.1 C10_SUPERCAP.1 R_CAPACITOR.2 U3.14
VUSB: J2.A4 J2.A9 J2.B4 J2.B9 PFMF.050.1.1

## Tracks (layer width: path | path; a pad name or v marks a point on that pad's centre or on a via)
3V3  (via drill 0.3)
  Top 0.127: 38.16,58.83 38.16,57.55 U1.7 | 38.16,58.83 36.51,58.83 36.07,59.27 32.51,59.27 31.75,58.51 31.75,57.62 30.42,56.28 U1.3 30.35,56.28 29.72,55.65 29.72,54.76 30.48,54 R5.2 30.48,51.2 v29.34,51.2 | 38.16,58.83 U1.8 | 34.89,31.36 34.86,31.33 34.86,30.44 35.05,30.25 36.2,30.25 38.1,32.16 R7.2 38.1,32.22 40.64,32.22 R6.2 40.64,32.16 v41.47,32.16 | 34.89,31.36 35.56,32.03 35.56,32.16 R8.2 | v19.24,44.92 20.32,44.92 R1.2 | v11.75,44.92 8.76,47.9 8.76,48.16 U2.2 | v32.77,31.39 34.86,31.39 34.89,31.36 | IC1.2 62.04,101.37 61.59,101.81 61.53,101.81 60.01,103.34 60.01,107.72 R_RESET.1 59.94,107.78 59.56,107.78 56.96,110.39 46.48,110.39 44.26,108.17 44.26,106.58 R_CHANGE.2 44.2,106.51 v42.16,106.51 | v19.05,106.51 R_BOOT.2 | v10.99,98.45 10.82,98.45 R10.2 9.19,99.71 C9.1 7.64,98.11 13.59,92.16 13.59,87.02 12.7,86.13 12.26,86.13 J4.P4 | 74.61,32.22 75.25,32.22 R_CL1.2 75.31,32.16 75.31,31.9 76.2,31.01 78.55,31.01 Q2.3 | 74.61,32.22 73.66,32.22 R9.2 73.66,32.16 v72.83,32.16 | 88.96,64.54 88.96,62.19 89.53,61.62 U3.2 | 88.96,64.54 89.66,65.24 90.87,65.24 91.57,64.54 D7.2 92.52,64.54 95.25,61.81 R2_PINH1.2 95.25,60.09 98.04,57.3 98.04,32.16 94.58,28.69 | 88.96,64.54 R1_PINH1.2 | 74.61,32.22 74.61,30.44 76.77,28.28 94.17,28.28 94.58,28.69 | v131.7,28.15 131.25,28.6 131,28.6 IC4.5 | v133.54,26.31 133.54,26.06 133.57,26.03 | 133.57,26.03 134.62,24.98 C3.+ 134.62,25.04 135.32,25.74 138.43,25.74 C1_BAT2.1 | v140.65,26.31 160.21,26.31 165.35,21.17 165.35,20.47 164.72,19.84 164.47,19.84 J3.3 | 133.57,26.03 124.27,16.72 106.74,16.72 TP16.TP 106.68,16.72 105.79,17.61 v105.66,17.61
  Top 0.127: v104.78,18.5 94.58,28.69
  Bottom 0.127: 14.22,44.92 v11.75,44.92 8.64,44.92 8.38,45.17 8.38,48.35 10.67,50.63 10.67,98.13 v10.99,98.45 v19.05,106.51 v42.16,106.51 | 14.22,44.92 v19.24,44.92 v32.77,31.39 | v29.34,51.2 29.08,51.2 24.07,46.19 14.48,46.19 14.22,45.93 14.22,44.92 | v131.7,28.15 v133.54,26.31 v140.65,26.31 | v105.66,17.61 v104.78,18.5 | v72.83,32.16 v41.47,32.16
32KHZ  (via drill 0.3)
  Top 0.15: R2_PINH1.1 95.25,58.83 93.53,58.83 90.81,61.55 U3.1 v90.81,63.02 | v23.3,54.13 17.65,48.47 17.65,48.22 U2.9
  Bottom 0.15: v23.3,54.13 78.23,54.13 87.38,63.27 90.55,63.27 v90.81,63.02
DN
  Top 0.15: 164.21,53.3 163.64,53.3 J2.B7 | 164.21,53.3 164.4,53.49 164.4,54 164.21,54.19 163.64,54.19 J2.A7 | D1.4 150.37,55.27 155.77,55.27 160.84,50.19 164.66,50.19 165.29,50.82 165.29,52.16 164.21,53.24 164.21,53.3
DP
  Top 0.15: 162.81,54 163,53.81 163.58,53.81 J2.A6 | 162.81,54 162.81,54.51 163,54.7 163.58,54.7 J2.B6 | D1.6 150.37,57.11 154.37,57.11 158.43,53.05 161.8,53.05 162.75,54 162.81,54
EPD_3V3  (via drill 0.3)
  Top 0.127: 80.87,29.96 81.85,28.98 C7.1 | 80.87,29.96 80.83,30 76.52,30 Q2.2 76.45,30.06 76.39,30.12 v75.63,30.12 | v75.25,35.84 75.25,45.36 TP17.TP | L1.2 82.55,31.65 80.87,29.96
  Bottom 0.127: v75.25,35.84 75.25,30.5 v75.63,30.12
EPD_3V3_C  (via drill 0.3)
  Top 0.127: R_CL1.1 75.31,30.82 76.01,30.82 76.2,30.63 77.72,30.63 78.04,30.31 79.06,30.31 79.25,30.5 79.25,31.46 78.8,31.9 76.52,31.9 Q2.1 76.45,31.96 76.45,32.16 v74.68,33.93 | v21.34,64.22 20.19,65.37 20.19,65.62 U2.18 | v54.04,54.57 68.64,39.97 TP13.TP 68.71,39.9 v69.66,38.95
  Bottom 0.127: v21.34,64.22 44.39,64.22 v54.04,54.57 | v69.66,38.95 v74.68,33.93
EPD_BUSY  (via drill 0.3)
  Top 0.15: v83.88,14.38 84.26,14.76 84.26,15.14 J1.9 | v13.46,10.37 9.84,6.75 TP9.TP | v9.97,64.54 9.97,65.62 U2.26
  Bottom 0.15: v83.88,14.38 79.88,10.37 v13.46,10.37 13.46,10.44 8.06,15.84 8.06,48.41 9.97,50.32 v9.97,64.54
EPD_CS
  Top 0.15: J1.12 82.8,15.14 82.8,14.18 84.45,12.53 86.49,12.53 88.96,15.01 88.96,19.27 87.57,20.66 74.99,20.66 74.42,20.09 66.86,20.09 63.88,23.07 TP10.TP 63.75,23.14 53.85,33.04 40.89,33.04 38.61,35.33 37.59,35.33 37.4,35.52 37.4,35.97 36.13,37.23 30.8,37.23 20.19,47.84 20.19,48.16 U2.11
EPD_DC  (via drill 0.3)
  Top 0.15: v83.25,14.38 83.25,15.14 J1.11 | v46.42,21.8 45.47,22.76 TP11.TP | v14.67,45.74 12.57,47.84 12.57,48.16 U2.5
  Bottom 0.15: v83.25,14.38 79.06,14.38 78.61,13.93 54.29,13.93 v46.42,21.8 46.35,21.8 22.42,45.74 v14.67,45.74
EPD_RST  (via drill 0.3)
  Top 0.15: v83.76,15.96 83.76,15.2 J1.10 | v74.23,20.54 70.42,20.54 61.47,29.49 TP12.TP 61.4,29.55 38.92,52.03 v38.92,54.57 | v19.05,62.7 16.38,65.37 16.38,65.62 U2.21
  Bottom 0.15: v83.76,15.96 83.76,18.31 81.41,20.66 74.36,20.66 v74.23,20.54 | v19.05,62.7 30.8,62.7 v38.92,54.57
FLASH_CS
  Top 0.15: U1.1 30.23,58.83 21.46,50.06 21.46,48.22 U2.12
GND  (via drill 0.3)
  Top 0.15: J2.B1 163.64,57.11 163.64,57.3 J2.A12 163.64,57.36 163.64,58.57 164.15,59.08 J2.MP4 163.58,58.57 154.69,58.57 153.54,59.71 152.53,59.71 152.34,59.52 152.34,57.81 | 152.34,57.81 149.73,57.81 148.15,56.22 147.89,56.22 D1.2 147.83,56.16 144.15,56.16 143.54,56.76 | 152.34,57.81 152.97,57.81 R2-USB1.1 | 132.97,38.5 132.97,37.87 129.86,34.76 129.54,34.76 C2_BAT.2 129.48,34.76 125.35,34.76 120.02,40.09 120.02,42.95 R2_BAT.1 | 132.97,38.5 132.33,39.14 MCP73831.2 | 143.54,56.76 R2-USB.2 | 143.54,56.76 135.89,49.11 C1_BAT.2 135.83,41.05 v135.19,40.41 | v133.29,38.5 132.97,38.5 | C5_USB.2 149.86,50.7 150.24,50.32 C4_USB.2 | J2.B12 163.64,50.89 163.64,50.7 J2.A1 163.58,50.63 v162.62,50.63 | C4_USB.2 150.3,50.25 160.34,50.25 160.84,49.74 v162.81,49.74 163.32,49.74 164.15,48.92 J2.MP3 164.21,48.92 168.08,48.92 J2.MP1 168.08,48.98 168.08,59.08 J2.MP2 | 161.16,11.77 160.59,11.77 160.08,11.26 160.08,11.07 SENSOR2.7 | 161.16,11.77 161.67,11.26 161.67,11.07 SENSOR2.5 | C1.2 160.02,8.09 158.75,8.09 C2.2 158.75,11.52 159.26,12.03 159.26,13.87 SENSOR2.1 159.26,13.99 159.26,14.69 | 159.26,16.09 163.96,20.79 164.4,20.79 J3.4 | 159.26,14.69 159.26,16.09 | 161.16,11.77 161.16,12.15 162.12,13.1 162.12,14.5 161.93,14.69 159.26,14.69 | 128.84,27.14 128.84,26.31 126.43,23.9 C1_BAT1.2 126.36,23.84 125.73,23.2 124.65,23.2 123.19,24.66 | 128.84,27.14 128.27,27.71 IC4.2 | 123.19,24.66 R1_PWRUSB.1 | U4.9 139.7,40.35 139.06,39.71 138.75,39.71 U4.4 | U4.1 138.75,41.11 139.06,41.11 139.7,40.47 U4.9 | U4.9 139.89,40.22 140.65,40.22 U4.6 140.72,40.16 142.94,40.16 150.3,47.52 150.3,50.19 C4_USB.2
  Top 0.15: 138.75,27.52 138.75,39.65 U4.4 | 138.75,27.52 138.43,27.2 C1_BAT2.2 138.43,27.14 135.38,27.14 134.62,27.9 C3.- 134.56,27.9 134.37,27.71 130.81,27.71 130.24,27.14 128.84,27.14 | 159.26,16.09 150.24,16.09 138.81,27.52 138.75,27.52 | v137.92,39.71 138.68,39.71 U4.4 | J4.G2 1.65,85.5 1.65,86.57 2.48,87.4 2.48,90.32 1.65,91.15 J4.G1 1.78,91.08 6.94,96.24 6.94,98.54 7.59,99.2 C9.2 8.17,99.41 9.03,100.26 10.09,100.26 11.46,98.89 13.14,98.89 13.48,98.56 D8.1 15.89,99 15.98,98.91 15.98,98.86 16.57,98.26 | RESET_BUTTON.1 62.29,108.17 65.72,108.17 RESET_BUTTON.2 65.79,108.17 70.74,108.17 C5.2 70.8,108.1 71.44,107.47 71.44,106.39 67.25,102.2 C_DELAY.2 67.31,102.07 66.55,102.83 64.33,102.83 64.2,102.7 64.2,102.39 62.29,100.48 62.1,100.48 IC1.3 62.04,100.48 60.2,100.48 54.17,106.51 54.1,106.51 | BOOT_BUTTON.1 22.29,108.17 25.72,108.17 BOOT_BUTTON.2 25.78,108.1 26.23,107.66 28.7,107.66 C6.2 28.77,107.59 29.4,107.59 | 54.1,106.51 54.1,107.4 53.47,108.04 53.47,108.23 C10.2 | 54.1,106.51 53.98,106.39 52.51,106.39 50.8,108.1 CHANGE_BUTTON.2 50.74,108.17 47.31,108.17 CHANGE_BUTTON.1 47.24,108.1 47.24,107.09 44.83,104.67 43.37,104.67 40.45,107.59 29.4,107.59 | 29.4,107.59 29.4,109.37 28.38,110.39 19.05,110.39 16.57,107.91 16.57,98.59 | U2.29_2 11.94,55.4 11.94,54.19 U2.29_1 12,54.19 13.14,54.19 U2.29_4 13.21,54.19 14.35,54.19 U2.29_7 | U2.29_2 11.94,55.46 11.94,56.6 U2.29_3 11.87,56.73 7.49,61.11 7.49,65.62 U2.28 7.49,65.68 7.49,66.06 v8.26,66.83 | U2.29_5 13.14,55.46 12,55.46 U2.29_2 | U2.29_6 13.14,56.6 13.14,55.52 U2.29_5 | U2.29_5 13.21,55.46 14.35,55.46 U2.29_8 14.41,55.46 14.41,56.6 U2.29_9 14.48,56.67 27.24,56.67 29.84,59.27 30.92,59.27 31.11,59.08 31.11,58.57 30.54,58 29.84,58 28.89,57.05 28.89,51.02 29.4,50.51 31.24,50.51 31.69,50.06 D9.1
  Top 0.15: 32.38,55.02 U1.4 | U1.9 32.38,55.02 | D9.1 31.75,50.06 32.45,50.76 32.45,55.02 32.38,55.02 | D10.1 40.64,34.82 39.97,35.49 | 39.97,35.49 31.81,43.65 31.81,49.81 D9.1 | 89.09,48.6 89.92,48.6 90.61,49.3 C8.2 95.82,49.3 97.73,51.2 97.73,52.79 96.84,53.68 96.84,54.19 C10_SUPERCAP.2 | 89.09,48.6 87,50.7 U3.13 | 83.63,39.77 79.82,39.77 72.39,32.34 72.39,31.96 72.9,31.46 72.9,27.71 D6.1 73.15,27.71 79.57,21.3 87.82,21.3 89.6,19.52 89.6,18.06 | 83.63,39.77 84.26,39.14 D4.1 | 89.09,48.6 89.09,45.3 83.63,39.84 83.63,39.77 | 34.86,34.63 32.45,34.63 31.11,35.97 TP5.TP 31.05,35.97 30.73,35.65 18.35,35.65 17.59,36.41 17.59,37.23 7.49,47.33 7.49,48.16 U2.1 | 34.86,34.63 35.56,34.63 D12.1 | 34.86,34.63 34.86,36.66 34.99,36.79 36.13,36.79 36.26,36.66 36.26,36.22 37.85,34.63 38.1,34.63 D11.1 38.16,34.57 38.92,34.57 39.02,34.47 | EPD_C12.1 69.85,15.64 72.33,15.64 EPD_C11.1 72.39,15.58 75.25,12.72 75.75,12.72 J1.MP2 75.82,12.72 v77.47,14.38 | 84.84,16.41 84.84,17.87 85.09,18.12 EPD_C5.1 85.15,18.18 86.36,18.18 EPD_C2.1 86.42,18.18 87.63,18.18 EPD_C1.1 | 84.84,16.41 84.84,15.2 J1.8 | EPD_C10.1 78.74,18.18 79.76,18.18 EPD_C9.1 79.82,18.18 80.26,18.18 | EPD_C6.1 82.93,18.18 81.92,18.18 EPD_C7.1 81.85,18.18 80.9,18.18 EPD_C8.1 80.77,18.18 80.26,18.18 | 80.36,14.79 80.33,14.82 80.33,15.14 J1.17 80.26,15.2 v80.26,15.96 | 80.36,14.79 83.25,11.9 86.74,11.9 87.5,12.66 89.28,12.66 J1.MP1 89.34,12.72 89.6,12.98 89.6,18.06 | v80.26,17.23 80.26,18.18 | v82.36,16.41 84.84,16.41 | SJ1.1 62.8,8.72 62.8,11.2 R2.1 62.87,11.26 62.87,15.9 | 62.87,15.9 63.88,16.91 65.85,16.91 69.03,13.74 R4.1 69.28,13.74 71.31,11.71 77.28,11.71 80.36,14.79
  Top 0.15: 62.87,15.9 62.8,15.9 62.55,16.15 52.58,16.15 TP4.TP 52.51,16.22 52.51,21.74 41.53,32.73 40.77,32.73 39.02,34.47 | v39.56,35.08 39.97,35.49 | 39.02,34.47 v38.92,34.38 | v8.57,74.7 14.86,80.99 J4.G4 14.86,81.05 14.86,81.37 12.38,83.84 12.26,83.84 J4.P6 12.38,83.91 15.81,87.34 15.81,94.13 J4.G3 15.88,94.2 15.88,96.16 17.6,97.89 17.96,97.89 18.08,98.01 18.08,99.11 17.96,99.23 16.82,99.23 16.7,99.11 16.7,98.72 16.57,98.59 | 123.19,24.66 117.79,24.66 111.19,18.06 89.6,18.06 | 16.57,98.59 16.52,98.54 16.52,98.31
  Bottom 0.15: v133.29,38.5 v135.19,40.41 137.22,40.41 v137.92,39.71 | v162.62,50.63 162.62,49.94 v162.81,49.74 | 80.26,16.22 v80.26,15.96 80.2,15.96 78.61,14.38 v77.47,14.38 | 80.26,16.22 v80.26,17.23 | v82.36,16.41 82.17,16.41 81.98,16.22 80.26,16.22 | v39.56,35.08 38.92,34.44 v38.92,34.38 | v8.57,74.7 8.57,67.14 v8.26,66.83
  pour Top: 6.02,46.62 0.08,46.62 0.08,0.08 73.92,0.08 73.92,10.02 73.94,10.04 73.96,10.06 73.98,10.08 92.22,10.08 92.24,10.06 92.26,10.04 92.28,10.02 92.28,0.08 170.12,0.08 170.12,67.12 92.18,67.12 92.16,67.14 92.14,67.16 92.12,67.18 92.12,111.12 67.68,111.12 67.68,110.68 67.66,110.66 67.64,110.64 67.62,110.62 19.38,110.62 19.36,110.64 19.34,110.66 19.32,110.68 19.32,111.12 0.08,111.12 0.08,66.98 6.02,66.98 6.04,66.96 6.06,66.94 6.08,66.92 6.08,46.68 6.06,46.66 6.04,46.64
  pour Bottom: 6.02,46.62 0.08,46.62 0.08,0.08 73.92,0.08 73.92,10.02 73.94,10.04 73.96,10.06 73.98,10.08 92.22,10.08 92.24,10.06 92.26,10.04 92.28,10.02 92.28,0.08 170.12,0.08 170.12,67.12 92.18,67.12 92.16,67.14 92.14,67.16 92.12,67.18 92.12,111.12 67.68,111.12 67.68,110.68 67.66,110.66 67.64,110.64 67.62,110.62 19.38,110.62 19.36,110.64 19.34,110.66 19.32,110.68 19.32,111.12 0.08,111.12 0.08,66.98 6.02,66.98 6.04,66.96 6.06,66.94 6.08,66.92 6.08,46.68 6.06,46.66 6.04,46.64
GPIO8
  Top 0.15: R1.1 20.32,43.58 19.94,43.58 18.8,44.73 18.8,48.09 18.86,48.16 U2.10
I2C_PW
  Top 0.15: 160.34,10.25 159.77,10.25 159.32,10.69 159.32,11.01 SENSOR2.8 159.32,11.07 159.32,11.33 160.02,12.03 160.02,13.87 SENSOR2.2 | 160.34,10.25 160.84,10.75 160.84,11.01 SENSOR2.6 | C2.1 158.75,6.75 160.02,6.75 C1.1 160.02,6.82 161.23,8.02 R1_PINH.2 | R1_PINH.2 161.29,8.09 162.56,8.09 R2_PINH.2 | 160.34,10.25 160.34,9.1 161.29,8.15 R1_PINH.2
INT_RTC  (via drill 0.3)
  Top 0.15: 87.63,62.83 87.63,62.25 88.27,61.62 U3.3 | 87.63,62.83 R1_PINH1.1 87.63,64.6 88.39,65.37 88.39,71.97 TP15.TP | v21.59,53.68 16.38,48.47 16.38,48.22 U2.8 | v87.57,62.83 87.63,62.83
  Bottom 0.15: v21.59,53.68 78.42,53.68 v87.57,62.83
IO/BOOT
  Top 0.15: C6.1 28.7,108.99 26.42,108.99 25.78,109.62 BOOT_BUTTON.3 25.72,109.69 22.29,109.69 BOOT_BUTTON.4 22.23,109.62 21.84,109.24 21.34,109.24 | 21.34,109.24 R_BOOT.1 | 21.34,109.24 21.34,107.53 23.94,104.93 23.94,65.68 U2.15
IO/CHANGE  (via drill 0.3)
  Top 0.15: C10.1 53.4,106.96 51.69,108.67 51.69,108.74 50.8,109.62 CHANGE_BUTTON.3 50.74,109.69 47.31,109.69 CHANGE_BUTTON.4 47.24,109.69 46.29,108.74 46.29,107.47 44.26,105.43 44.26,105.24 R_CHANGE.1 44.2,105.24 v43.43,105.24 | v13.84,69.37 13.84,65.68 U2.23
  Bottom 0.15: v13.84,69.37 13.84,75.65 v43.43,105.24
MISO
  Top 0.15: U1.2 30.54,57.55 31.43,58.44 31.43,60.16 29.4,62.19 TP6.TP 29.34,62.25 11.62,62.25 8.76,65.11 8.76,65.62 U2.27 8.7,65.68 8.7,71.02 6.1,73.62 6.1,77.18 11.68,82.76 12,82.76 J4.P7
MOSI  (via drill 0.3)
  Top 0.15: TP7.TP 18.8,36.92 15.11,40.6 15.11,48.16 U2.7 15.05,48.22 15.05,49.55 v13.14,51.46 | v13.14,87.21 12.06,87.21 J4.P3 | v81.79,16.66 81.79,15.2 J1.14 | v71.56,22.57 39.12,55.02 U1.5 38.16,55.08 v37.34,55.08
  Bottom 0.15: v13.14,51.46 13.14,55.08 | 13.14,55.08 v13.14,87.21 | v81.79,16.66 81.47,16.66 80.45,17.68 80.07,17.68 79.76,17.36 79.76,17.23 79.5,16.98 77.15,16.98 v71.56,22.57 | v37.34,55.08 13.14,55.08
N$1
  Top 0.15: R2-USB.1 144.84,56.73 145.8,56.73 149.48,60.41 165.29,60.41 165.42,60.29 165.42,56.73 164.47,55.78 163.64,55.78 J2.B5
N$2  (via drill 0.3)
  Top 0.15: v158.62,53.49 153.03,59.08 R2-USB1.2 | v162.5,53.11 162.69,53.11 163,52.79 163.58,52.79 J2.A5
  Bottom 0.15: v158.62,53.49 162.12,53.49 v162.5,53.11
N$4
  Top 0.15: C1_BAT1.1 125.09,23.9 125.09,26 125.73,26.63 D2.1 125.79,26.69 125.86,26.76 127.44,26.76 | 127.44,26.76 128.08,26.76 IC4.3 | 127.44,26.76 127.44,28.09 127.95,28.6 128.08,28.6 IC4.1 128.21,28.66 128.71,29.17 131.95,29.17 137.35,34.57 138.05,34.57 Q1.2
N$5
  Top 0.15: C4.1 95.25,31.07 91.95,34.38 91.95,35.33 D3.1 91.89,35.39 90.23,37.05 85.09,37.05 83,39.14 D4.2
N$6
  Top 0.15: R2_BAT.2 121.35,42.95 121.35,39.2 122.3,38.25 129.48,38.25 MCP73831.5
N$7
  Top 0.15: R4.2 67.75,13.74 65.47,16.03 Q3.1
N$8
  Top 0.15: J1.4 86.81,15.77 88.65,17.61 88.65,18.69 87.88,19.45 87.63,19.45 EPD_C1.2
N$9
  Top 0.15: R1_BAT.2 130.94,39.14 131.83,38.25 132.08,38.25 MCP73831.1
N$10
  Top 0.15: CHG_LED.C 124.97,41.68 124.97,41.55 122.56,39.14 R1_BAT.1
N$11
  Top 0.15: J1.5 86.36,15.2 86.36,15.77 88.33,17.74 88.33,18.57 88.01,18.88 86.93,18.88 86.36,19.45 EPD_C2.2
N$12
  Top 0.15: J1.18 79.82,15.2 79.82,16.15 81.28,17.61 83.5,17.61 83.63,17.74 83.63,18.82 83,19.45 EPD_C6.2
N$13  (via drill 0.3)
  Top 0.15: v79.31,17.42 79.31,15.2 J1.19 | v81.22,20.22 81.92,19.52 EPD_C7.2
  Bottom 0.15: v79.31,17.42 79.31,18.31 v81.22,20.22
N$14
  Top 0.15: J1.20 78.74,15.14 78.74,14.69 76.07,12.03 72.33,12.03 69.15,15.2 69.15,17.36 71.56,19.77 77.92,19.77 78.17,20.03 80.33,20.03 80.83,19.52 EPD_C8.2
N$15
  Top 0.15: J1.21 78.3,17.49 78.04,17.74 78.04,18.57 78.36,18.88 79.25,18.88 79.82,19.45 EPD_C9.2
N$16
  Top 0.15: J1.22 77.79,15.2 77.79,17.55 77.72,17.61 77.72,18.69 78.49,19.45 78.74,19.45 EPD_C10.2
N$17
  Top 0.15: J1.24 76.77,15.2 73.91,15.2 72.77,16.34 70.42,16.34 69.85,16.91 EPD_C12.2
N$18
  Top 0.15: J1.23 77.28,15.2 77.28,15.58 75.95,16.91 72.39,16.91 EPD_C11.2
N$19
  Top 0.15: J1.16 80.83,15.2 81.28,15.2 J1.15 81.28,15.26 81.28,16.79 81.6,17.11 83.44,17.11 83.95,17.61 83.95,18.12 85.09,19.27 EPD_C5.2
N$20
  Top 0.15: C_DELAY.1 67.31,100.73 66.48,100.73 64.96,102.26 IC1.5
N$21  (via drill 0.3)
  Top 0.15: v92.33,52.86 90.3,54.89 90.3,62.64 90.36,62.7 90.36,64.54 D7.1 | v93.15,52.03 93.98,51.2 R_CAPACITOR.1
  Bottom 0.15: v93.15,52.03 v92.33,52.86
N$22
  Top 0.15: R8.1 35.56,30.88 35.56,31.01 36.26,31.71 36.26,35.33 35.56,36.03 D12.2
N$27
  Top 0.15: R10.1 9.56,96.86 15.57,96.86 17.27,98.56 D8.2
RESE  (via drill 0.3)
  Top 0.15: v85.47,12.98 87.25,14.76 87.25,15.14 J1.3 | v83.06,10.56 68.52,10.56 67.79,9.83 | 67.79,9.83 67.31,9.36 R3.2 | 67.79,9.83 64.14,13.49 64.14,16.03 Q3.2
  Bottom 0.15: v83.06,10.56 v85.47,12.98
RESE'
  Top 0.15: R3.1 67.31,8.02 64.9,8.02 SJ1.2 64.2,8.66 64.2,11.2 R2.2
RESET  (via drill 0.3)
  Top 0.15: 62.04,106.83 62.04,102.32 IC1.1 | 60.67,108.2 60.01,108.86 60.01,108.99 R_RESET.2 60.01,108.8 v59.18,108.8 | 60.67,108.2 62.04,106.83 | 62.04,106.83 70.74,106.83 C5.1 | 60.67,108.2 62.1,109.62 62.23,109.62 RESET_BUTTON.4 62.29,109.69 65.72,109.69 RESET_BUTTON.3 | v9.53,58 9.97,57.55 9.97,48.22 U2.3
  Bottom 0.15: v9.53,58 9.53,97.62 20.7,108.8 v59.18,108.8
RTC_RST
  Top 0.15: U3.4 87,61.87 84.77,64.09 24,64.09 22.73,65.37 22.73,65.62 U2.16
RX
  Top 0.15: U2.24 12.57,65.68 12.57,68.73 17.34,73.49 TP2.TP
SCK  (via drill 0.3)
  Top 0.15: J1.13 82.36,15.14 82.36,14.18 84.33,12.22 86.61,12.22 89.28,14.88 89.28,19.39 87.69,20.98 73.79,20.98 38.48,56.28 U1.6 38.16,56.22 37.85,56.22 v34.86,53.24 | v14.61,49.3 13.84,48.54 13.84,48.22 U2.6 | v11.11,84.23 11.81,84.92 12,84.92 J4.P5 | TP8.TP 13.97,40.22 v8.83,45.36
  Bottom 0.15: v34.86,53.24 30.73,53.24 26.8,49.3 v14.61,49.3 14.61,49.36 13.72,50.25 | v11.11,84.23 11.11,52.86 13.72,50.25 | 13.72,50.25 v8.83,45.36
SCL  (via drill 0.3)
  Top 0.15: v141.48,40.6 140.72,40.6 U4.7 | v163.39,18.69 163.39,18.57 164.15,17.8 164.4,17.8 J3.1 164.15,17.74 164.15,8.53 162.56,6.94 R2_PINH.1 | v161.42,13.04 161.61,13.23 161.61,13.87 SENSOR2.4 | U2.20 17.65,65.62 17.65,65.37 19.56,63.46 77.98,63.46 87.88,53.55 88.58,53.55 89.03,53.11 89.03,51.2 89.22,51.02 89.85,51.02 90.81,51.97 U3.16 90.87,52.03 v91.5,52.03
  Bottom 0.15: v161.42,13.04 161.23,13.04 161.1,13.17 160.72,13.17 160.46,12.91 160.46,12.53 160.72,12.28 161.73,12.28 163.39,13.93 v163.39,18.69 v141.48,40.6 137.48,40.6 126.49,51.59 91.95,51.59 v91.5,52.03
SDA  (via drill 0.3)
  Top 0.15: v141.86,41.11 140.72,41.11 U4.8 | v163.39,19.58 164.15,18.82 164.4,18.82 J3.2 164.47,18.76 164.78,18.76 165.35,18.18 165.35,8.41 163.13,6.18 161.99,6.18 161.48,6.69 161.29,6.69 R1_PINH.1 | v160.91,12.72 160.91,13.87 SENSOR2.3 | U2.19 18.92,65.62 18.92,65.37 20.51,63.78 78.11,63.78 88.01,53.87 88.71,53.87 89.53,53.05 U3.15 89.6,53.05 89.98,53.43 v90.17,53.43
  Bottom 0.15: v160.91,12.72 161.1,12.72 161.23,12.6 161.61,12.6 161.86,12.85 161.86,13.23 161.61,13.49 160.59,13.49 160.15,13.04 160.15,12.41 160.59,11.96 161.86,11.96 163.83,13.93 163.83,19.07 163.39,19.52 v163.39,19.58 v141.86,41.11 137.41,41.11 125.09,53.43 v90.17,53.43
SRC  (via drill 0.3)
  Top 0.15: C4.2 95.25,31.96 95.95,31.27 95.95,30.44 95.12,29.61 89.09,29.61 88.46,30.25 D5.2 88.39,30.31 88.39,30.44 84.58,34.25 v82.55,34.25 L1.1 | v64.77,16.47 Q3.3
  Bottom 0.15: v82.55,34.25 v64.77,16.47
SS_SD
  Top 0.15: U2.4 11.24,48.22 11.24,56.92 6.29,61.87 6.29,72.98 5.78,73.49 5.78,82.45 11.56,88.23 J4.P2
TX
  Top 0.15: U2.25 11.24,65.68 11.24,70.19 7.37,74.06 TP1.TP
USB_D+  (via drill 0.3)
  Top 0.15: v146.81,57.11 147.83,57.11 D1.1 | v26.73,48.22 24,48.22 U2.14
  Bottom 0.15: v146.81,57.11 82.3,57.11 73.41,48.22 v26.73,48.22
USB_D-  (via drill 0.3)
  Top 0.15: v142.69,55.27 147.83,55.27 D1.3 | v25.72,47.2 23.37,47.2 22.73,47.84 22.73,48.16 U2.13
  Bottom 0.15: v142.69,55.27 80.9,55.27 72.83,47.2 v25.72,47.2
VBAT
  Top 0.127: U4.2 138.75,40.6 138.75,40.22 U4.3 138.68,40.16 137.73,40.16 137.16,39.58 137.16,39.2 | Q1.3 133.86,33.42 129.54,33.42 C2_BAT.1 129.54,33.36 127.13,30.95 114.36,30.95 TP3.TP | Q1.3 137.16,39.2 | Q1.3 | 137.16,39.2 134.11,39.2 133.29,40.03 132.14,40.03 MCP73831.3
VBUS
  Top 0.127: Q1.1 136.21,34.57 135.38,34.57 130.3,29.49 126.43,29.49 125.73,28.79 D2.2 125.73,28.73 125.41,28.41 123.19,28.41 R1_PWRUSB.2 123.19,28.34 120.4,25.55 116.9,25.55 TP14.TP 116.9,25.61 116.9,26.63 113.09,30.44 113.09,37.17 119.57,43.65 124.46,43.65 126.43,41.68 CHG_LED.A 127.89,41.68 129.48,40.09 MCP73831.4 129.54,40.09 130.05,40.6 133.1,40.6 133.92,39.77 135.89,39.77 | D1.5 150.3,56.16 150.05,56.16 148.59,54.7 148.59,52.6 C5_USB.1 148.59,52.54 148.91,52.22 148.91,50.32 C4_USB.1 148.91,50.25 147.07,48.41 147.07,47.14 PFMF.050.1.2 147,47.08 143.83,47.08 136.53,39.77 135.89,39.77 | 135.89,39.77 C1_BAT.1
VRTC
  Top 0.127: 93.98,52.47 96.33,52.47 96.77,52.03 C10_SUPERCAP.1 | 89.44,50.41 88.27,51.59 U3.14 | 89.44,50.41 89.47,50.38 89.47,49.3 C8.1 | 93.98,52.47 92.58,52.47 90.55,50.44 89.47,50.44 89.44,50.41 | 93.98,52.47 R_CAPACITOR.2
VUSB  (via drill 0.3)
  Top 0.127: J2.A4 163.64,51.46 163.64,51.71 J2.B9 163.58,51.78 163.07,51.78 v162.62,52.22 | J2.A9 163.64,56.54 163.64,56.28 J2.B4 163.58,56.22 163.07,56.22 v162.62,55.78 | v157.54,47.14 151.57,47.14 PFMF.050.1.1
  Bottom 0.127: v162.62,55.78 162.94,55.46 162.94,52.92 162.62,52.6 v162.62,52.22 v157.54,47.14